# Altium PCB 模块PCB封装.PcbDoc
Units mil, origin at the board's own origin, x right, y up, seen from the top; angles counter-clockwise.
Board outline 6000 x 4000 mil, 2 copper layers (Top Layer, Bottom Layer); 1 components, 0 nets, 14 pads, 0 vias.
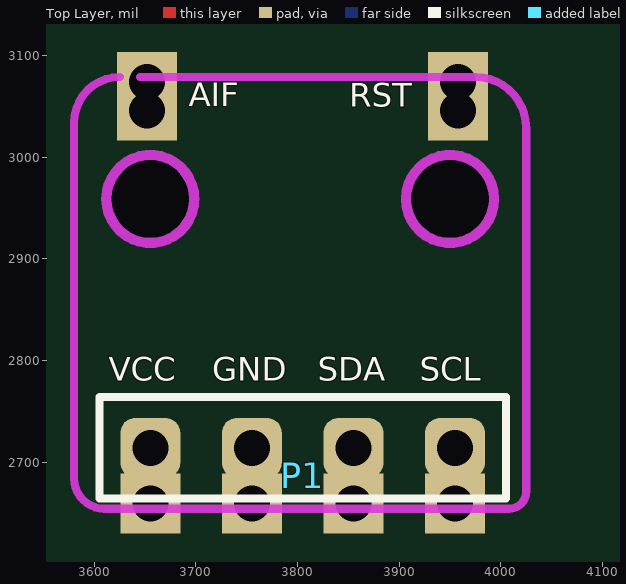
[diagram p0: Top Layer view]
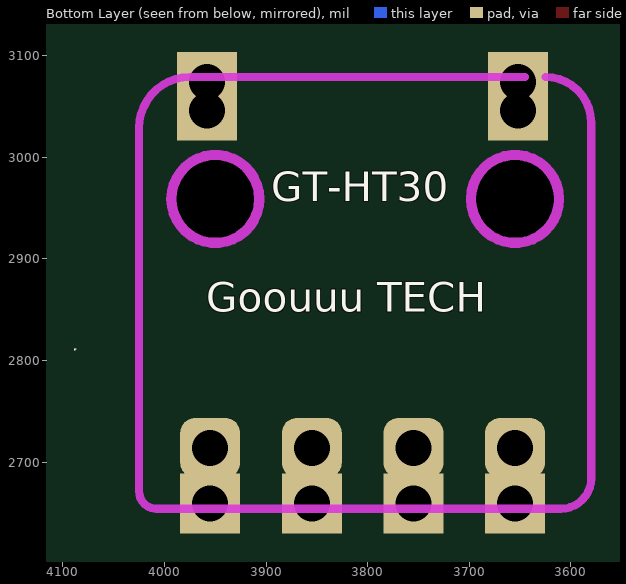
[diagram p1: Bottom Layer view, seen from below]

## Layer stack, top to bottom
Top Solder: solder mask 0.4, Solder Resist, Dk 3.5
Top Layer: signal copper 1.4
Dielectric 1: dielectric 12.6, FR-4, Dk 4.8
Bottom Layer: signal copper 1.4
Bottom Solder: solder mask 0.4, Solder Resist, Dk 3.5

## Board outline
1000,1000 7000,1000 7000,5000 1000,5000

## Design rules (kind name [scope] priority, off if disabled: settings)
Clearance [All] p1: gap=10 ignorepadtopadclearanceinfootprint=FALSE except(0: Arc-Hole Track-Hole SMDPad-Hole THPad-Hole Via-Hole Fill-Hole Poly-Hole Region-Hole Text-Hole)
PolygonConnect [All] p1: connectstyle=Relief reliefconductorwidth=10 reliefentries=4 polygonreliefangle="90 Angle" airgapwidth=10
RoutingVias [All] p1: holewidth=28 width=50 viastyle="Through Hole" minholewidth=28 minwidth=50 maxholewidth=28 maxwidth=50
SolderMaskExpansion [All] p1: expansion=4 istentingtop=FALSE
Width [All] p1: maxlimit=10 minlimit=10 preferedwidth=10
30 further rules are at their usual default settings.

## Components (designator, comment, footprint, x,y, rotation, side; value= is the part's Value field where it differs from the comment)
P1 "Header 4" HDR1X4 3655,2714 r0 top

## Footprints (in the part's own frame and the unit in brackets; to place one, negate y for a bottom-side part, rotate by r counter-clockwise, add the part's x,y. Pads: shape width x height; smd on the part's side, far side on the other; paste and mask are expansions set on the pad)
HDR1X4 [mm] "Connector; Header; 4 Position"
  rect 1.5x1.5 hole 0.9: 1(7.62,-1.397) 2(5.08,-1.397) 3(2.54,-1.397) 4(0,-1.397)
  rrect50% 1.5x1.5 hole 0.9: 1(7.62,0) 2(5.08,0) 3(2.54,0) 4(0,0)
  silkscreen extent -1.27,-1.27 8.89,1.27

## Part data
P1: "Header, 4-Pin"

## Free pads (board coordinates)
  rect 59.06x59.06 hole 35.43: 3(3652,3046) 3(3652,3074) 3(3958,3046) 3(3958,3074)
  round 86.61 hole 86.61: 4(3655,2959) 5(3950,2959)

## Nets (pads, with @x,y where several pads share a name; then routed paths per layer and width w, separated by ;. In a path a pad name is that pad's centre, name@x,y a point inside that pad or via, vN(x,y) a via of type N, cw(c..) or ccw(c..) an arc to the next point about the centre after c; other vN are vias at no path point)
pads on no net: P1.1 P1.2 P1.3 P1.4

## Keep-outs
Keep-Out Layer:
  circle w10: c3950,2959 r43.31
  circle w10: c3655,2959 r43.31
  lines w8: 3625,3079 ccw(c3625,3034) 3580,3034 3580,2684 ccw(c3610,2684) 3610,2654 4007.93,2654 ccw(c4007.93,2671.07) 4025,2671.07 4025,3029 ccw(c3975,3029) 3975,3079 3645,3079 3965,3079

## Silkscreen, mask and mechanical layers (free items; w line width, h text height)
Top Overlay:
  text "AIF" at 3693,3042.48 h40
  text "RST" at 3851,3042 h40
  text "VCC" at 3614,2772 h40
  text "GND" at 3716,2772 h40
  text "SDA" at 3820,2772 h40
  text "SCL" at 3920,2772 h40
Bottom Overlay:
  lines w1: 4087,2811 4089,2811 ; 4088,2810 4089,2810
  text "GT-HT30" at 3895,2947 h50
  text "Goouuu TECH" at 3959,2838 h50